# EAGLE board GEN7_Itux_RepRapBoard2 (EAGLE 6.1)
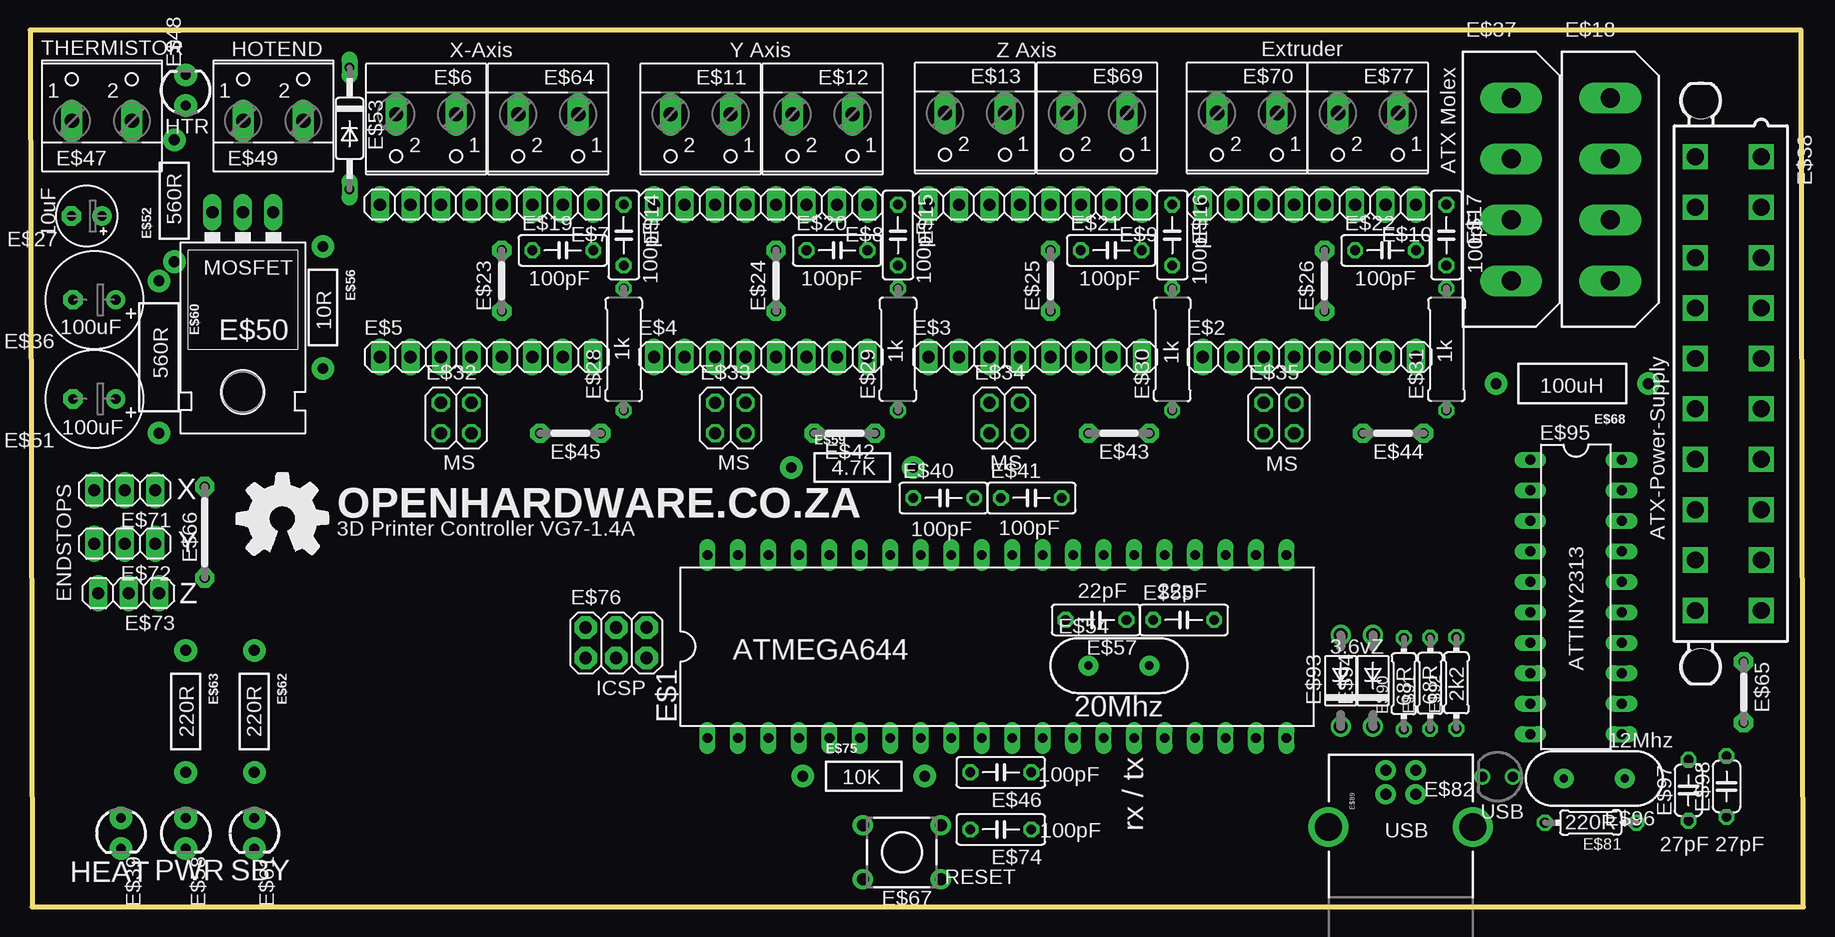
[diagram p0: board, top side]
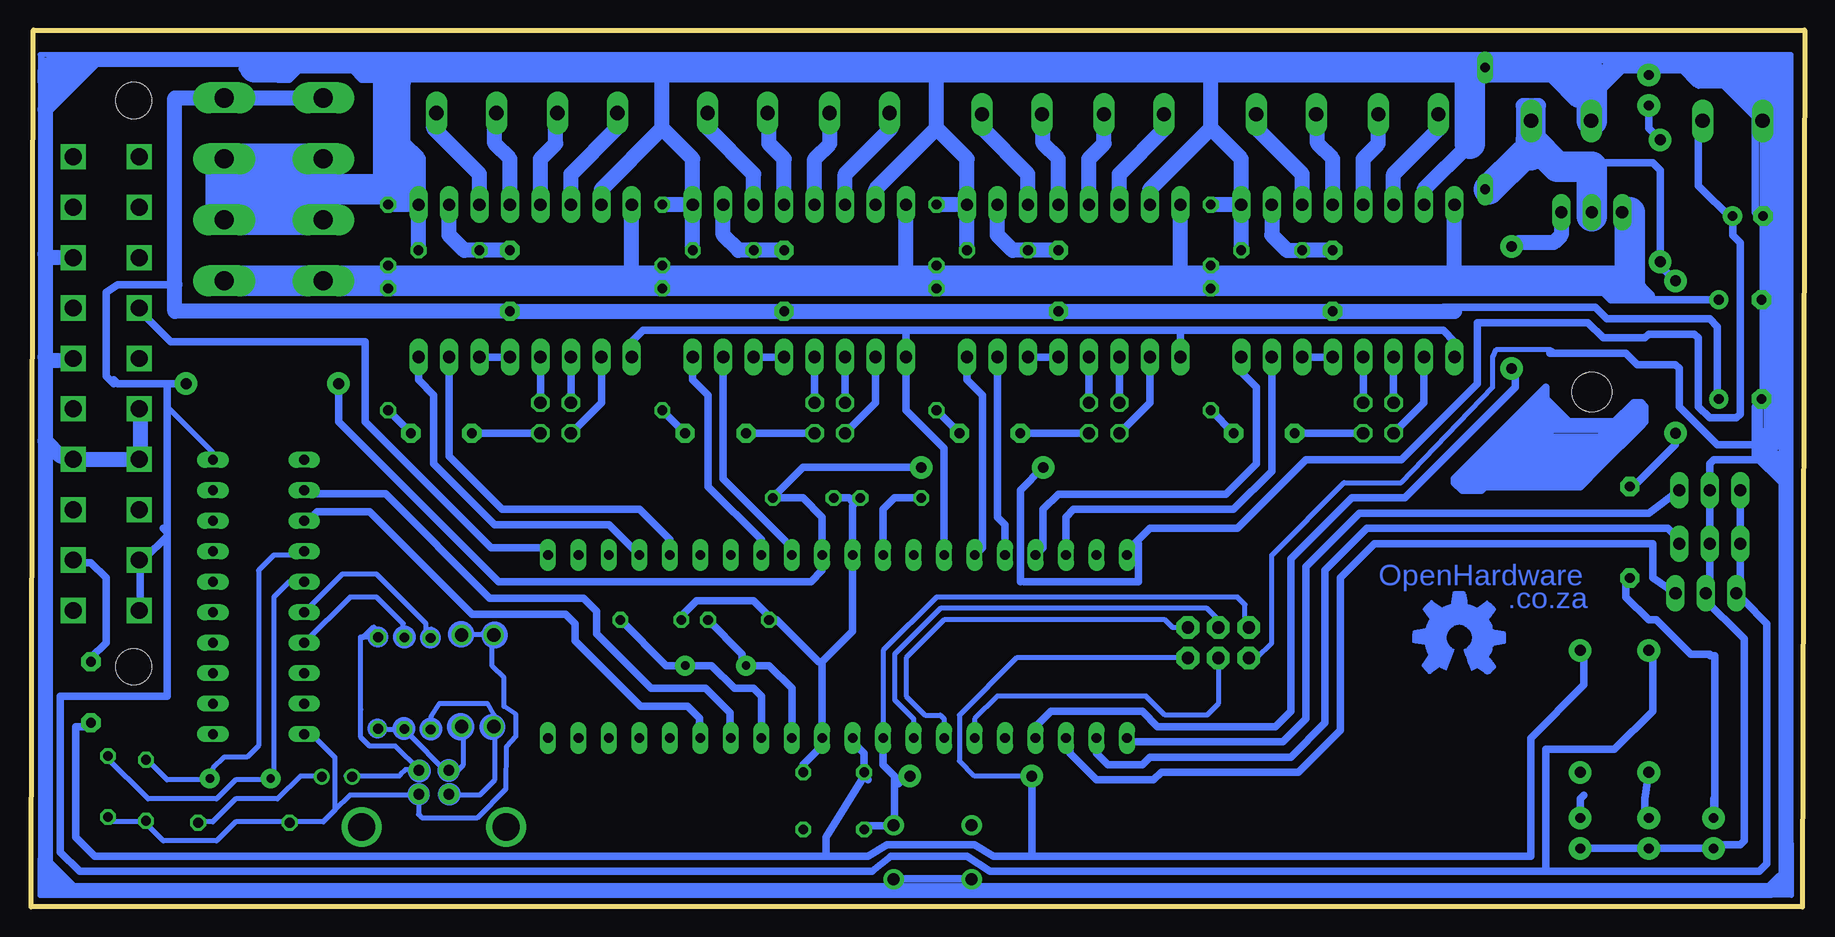
[diagram p1: board, bottom side, seen from below]

Size 147.82 x 73.06 mm. Coordinates in mm from the lower left corner, seen from the top.
Outline: 0,73.06 0.19,0 147.82,0 147.64,73.06 0,73.06
Copper layers (1*16): Top 0.035mm / dielectric 1.5mm / Bottom 0.035mm
Design rules: minimum track width 10mil, minimum drill 24mil, track to track 8mil, track to pad 8mil, pad to pad 8mil, via to via 8mil, smd to smd 8mil, copper to edge 40mil, drill to drill 8mil, minimum pad ring 10mil, minimum via ring 8mil, stop-mask expansion 4mil, vias tented up to drill 0mil, thermal gap 10mil

## Footprints (pad centres in the part's own frame; a part is rotated, then mirrored left to right if it is on the bottom)
DIL40 = drill 0.813 long: 1 -24.13,-7.62; 2 -21.59,-7.62; 3 -19.05,-7.62; 4 -16.51,-7.62; 5 -13.97,-7.62; 6 -11.43,-7.62; 7 -8.89,-7.62; 8 -6.35,-7.62; 9 -3.81,-7.62; 10 -1.27,-7.62; 11 1.27,-7.62; 12 3.81,-7.62; 13 6.35,-7.62; 14 8.89,-7.62; 15 11.43,-7.62; 16 13.97,-7.62; 17 16.51,-7.62; 18 19.05,-7.62; 19 21.59,-7.62; 20 24.13,-7.62; 21 24.13,7.62; 22 21.59,7.62; 23 19.05,7.62; 24 16.51,7.62; 25 13.97,7.62; 26 11.43,7.62; 27 8.89,7.62; 28 6.35,7.62; 29 3.81,7.62; 30 1.27,7.62; 31 -1.27,7.62; 32 -3.81,7.62; 33 -6.35,7.62; 34 -8.89,7.62; 35 -11.43,7.62; 36 -13.97,7.62; 37 -16.51,7.62; 38 -19.05,7.62; 39 -21.59,7.62; 40 -24.13,7.62
1X08 = drill 1.016 long: 1 -8.89,0; 2 -6.35,0; 3 -3.81,0; 4 -1.27,0; 5 1.27,0; 6 3.81,0; 7 6.35,0; 8 8.89,0
W237-102 = drill 1.194 long: 1 -2.5,-1.27; 2 2.5,-1.27
C050-025X075 = drill 0.813 octagon: 1 -2.54,0; 2 2.54,0
9090-4V = drill 1.6 pad 2.6 long: 1 -7.62,0; 2 -2.54,0; 3 2.54,0; 4 7.62,0
05 = drill 0.813 pad 1.6 octagon: 1 -2.54,0; 2 2.54,0
E2,5-5 = drill 0.813 pad 1.6: + -1.27,0 | drill 0.813 pad 1.6 octagon: - 1.27,0
0309/10 = drill 0.813 octagon: 1 -5.08,0; 2 5.08,0
2X02 = drill 1.016 octagon: 1 -1.27,-1.27; 2 -1.27,1.27; 3 1.27,-1.27; 4 1.27,1.27
E3,5-8 = drill 0.813 pad 1.6: + -1.778,0 | drill 0.813 pad 1.6 octagon: - 1.778,0
5566-20 = drill 1.4 square: 1 18.9,-2.75; 2 14.7,-2.75; 3 10.5,-2.75; 4 6.3,-2.75; 5 2.1,-2.75; 6 -2.1,-2.75; 7 -6.3,-2.75; 8 -10.5,-2.75; 9 -14.7,-2.75; 10 -18.9,-2.75; 11 18.9,2.75; 12 14.7,2.75; 13 10.5,2.75; 14 6.3,2.75; 15 2.1,2.75; 16 -2.1,2.75; 17 -6.3,2.75; 18 -10.5,2.75; 19 -14.7,2.75; 20 -18.9,2.75 | hole 3: 23.6,2.29; -23.6,2.29
LED3MM = drill 0.813 pad 1.88: A -1.27,0; K 1.27,0
TO-220-ALT = drill 1.016 long: GND 0,-3.81; IN -2.54,-3.81; OUT 2.54,-3.81 | hole 3.302: 0,11.176
AXIAL-0.4 = drill 0.9 pad 1.88: P$1 -5.08,0; P$2 5.08,0
C2992 = drill 0.813 long: A 5.08,0; C -5.08,0
HC49US = drill 0.7 pad 1.651: 1 -2.54,0; 2 2.54,0
AXIAL-0.5 = drill 0.9 pad 1.88: P$1 -6.35,0; P$2 6.35,0
07 = drill 0.813 pad 1.6 octagon: 1 -3.81,0; 2 3.81,0
TL1105 = drill 1 pad 1.676: 1 -2.25,3.25; 2 2.25,3.25; 3 -2.25,-3.25; 4 2.25,-3.25
1X03 = drill 1.016 long: 1 -2.54,0; 2 0,0; 3 2.54,0
2X03 = drill 1.016 pad 1.88 octagon: 1 -2.54,-1.27; 2 -2.54,1.27; 3 0,-1.27; 4 0,1.27; 5 2.54,-1.27; 6 2.54,1.27
0204/7 = drill 0.813 octagon: 1 -3.81,0; 2 3.81,0
LED3MM-NS = drill 0.813: A -1.27,0; K 1.27,0
USB-B-PTH = drill 0.914 pad 1.676: D+ 0,1.25; D- 1.981,1.25; GND 0,-1.25; VBUS 1.981,-1.25 | drill 2.286: S1 -2.718,-6.02; S2 -2.718,6.02
DO41-7 = drill 1.118: A 3.81,0; C -3.81,0
DIL20 = drill 0.813 long: 1 -11.43,-3.81; 2 -8.89,-3.81; 3 -6.35,-3.81; 4 -3.81,-3.81; 5 -1.27,-3.81; 6 1.27,-3.81; 7 3.81,-3.81; 8 6.35,-3.81; 9 8.89,-3.81; 10 11.43,-3.81; 11 11.43,3.81; 12 8.89,3.81; 13 6.35,3.81; 14 3.81,3.81; 15 1.27,3.81; 16 -1.27,3.81; 17 -3.81,3.81; 18 -6.35,3.81; 19 -8.89,3.81; 20 -11.43,3.81
C050-024X044 = drill 0.813 octagon: 1 -2.54,0; 2 2.54,0

## Placement (x,y rotation side)
E$1  [DIL40]  80.61,21.68 0 top
E$2  [1X08]  106.64,45.81 0 top
E$3  [1X08]  83.78,45.81 0 top
E$4  [1X08]  60.92,45.81 0 top
E$5  [1X08]  38.06,45.81 0 top
E$6  [W237-102]  33.02,64.77 180 top
E$7  [1X08]  38.06,58.51 180 top
E$8  [1X08]  60.92,58.51 180 top
E$9  [1X08]  83.78,58.51 180 top
E$10  [1X08]  106.64,58.51 180 top
E$11  [W237-102]  55.89,64.77 180 top
E$12  [W237-102]  66.07,64.77 180 top
E$13  [W237-102]  78.76,64.86 180 top
E$14  [C050-025X075]  49.49,55.97 270 top
E$15  [C050-025X075]  72.35,55.97 270 top
E$16  [C050-025X075]  95.21,55.97 270 top
E$17  [C050-025X075]  118.07,55.97 270 top
E$18  [9090-4V]  131.73,59.78 270 top
E$19  [C050-025X075]  44.41,54.7 0 top
E$20  [C050-025X075]  67.27,54.7 0 top
E$21  [C050-025X075]  90.13,54.7 0 top
E$22  [C050-025X075]  112.99,54.7 0 top
E$23  [05]  39.33,52.16 90 top
E$24  [05]  62.19,52.16 90 top
E$25  [05]  85.05,52.16 90 top
E$26  [05]  107.91,52.16 90 top
E$27  [E2,5-5]  4.73,57.56 180 top
E$28  [0309/10]  49.49,46.45 90 top
E$29  [0309/10]  72.35,46.45 90 top
E$30  [0309/10]  95.21,46.45 90 top
E$31  [0309/10]  118.07,46.45 90 top
E$32  [2X02]  35.52,40.73 0 top
E$33  [2X02]  58.38,40.73 0 top
E$34  [2X02]  81.24,40.73 0 top
E$35  [2X02]  104.1,40.73 0 top
E$36  [E3,5-8]  5.36,50.58 180 top
E$37  [9090-4V]  123.47,59.78 270 top
E$38  [5566-20]  141.57,43.59 90 top
E$39  [LED3MM]  7.58,6.13 270 top
E$40  [C050-025X075]  76.16,34.07 0 top
E$41  [C050-025X075]  83.47,34.07 0 top
E$42  [05]  67.91,39.46 180 top
E$43  [05]  90.77,39.46 180 top
E$44  [05]  113.63,39.46 180 top
E$45  [05]  45.05,39.46 180 top
E$46  [C050-025X075]  80.93,11.21 180 top
E$47  [W237-102]  6,66.77 0 top
E$48  [LED3MM]  12.98,68.04 90 top
E$49  [W237-102]  20.28,66.77 0 top
E$50  [TO-220-ALT]  17.74,54.07 180 top
E$51  [E3,5-8]  5.36,42.32 180 top
E$52  [AXIAL-0.4]  12.03,58.83 90 top
E$53  [C2992]  26.63,64.86 270 top
E$54  [HC49US]  90.77,20.1 0 top
E$55  [C050-025X075]  96.17,23.91 0 top
E$56  [AXIAL-0.4]  24.41,49.94 270 top
E$57  [C050-025X075]  88.86,23.91 180 top
E$58  [LED3MM]  12.98,6.13 270 top
E$59  [AXIAL-0.4]  68.54,36.61 0 top
E$60  [AXIAL-0.5]  10.76,45.81 270 top
E$61  [LED3MM]  18.7,6.13 270 top
E$62  [AXIAL-0.4]  18.7,16.29 270 top
E$63  [AXIAL-0.4]  12.98,16.29 270 top
E$64  [W237-102]  43.2,64.77 180 top
E$65  [05]  142.84,17.87 270 top
E$66  [07]  14.57,31.21 90 top
E$67  [TL1105]  72.67,4.54 90 top
E$68  [AXIAL-0.5]  128.55,43.59 180 top
E$69  [W237-102]  88.94,64.86 180 top
E$70  [W237-102]  101.45,64.86 180 top
E$71  [1X03]  7.9,34.7 180 top
E$72  [1X03]  7.9,30.26 180 top
E$73  [1X03]  8.22,26.13 180 top
E$74  [C050-025X075]  80.93,6.44 180 top
E$75  [AXIAL-0.4]  69.5,10.89 0 top
E$76  [2X03]  48.86,22 0 top
E$77  [W237-102]  111.53,64.86 180 top
E$81  2K2  [0204/7]  130.09,7.01 180 top
E$82  [LED3MM-NS]  122.32,10.82 180 top
E$89  [USB-B-PTH]  114.25,9.38 90 top
E$90  68RD+  [0204/7]  114.52,18.59 90 top
E$91  68Rd-  [0204/7]  116.71,18.62 90 top
E$92  2K2  [0204/7]  118.9,18.65 90 top
E$93  [DO41-7]  109.26,18.84 90 top
E$94  [DO41-7]  111.94,18.84 90 top
E$95  [DIL20]  128.87,25.81 270 top
E$96  [HC49US]  130.39,10.68 180 top
E$97  [C050-024X044]  138.25,9.7 90 top
E$98  [C050-024X044]  141.42,10.02 90 top

## Library data of the parts
E$1 = atmel
E$2-E$5 E$7-E$10 E$32-E$35 E$71-E$73 = pinhead
E$6 E$11-E$13 E$47 E$49 E$64 E$69 E$70 E$77 = con-wago-500
E$14-E$17 E$19-E$22 E$27-E$31 E$36 E$40 E$41 E$46 E$51 E$55 E$57 E$74 E$81 E$90-E$92 E$97 E$98 = rcl
E$18 E$37 = con-thomas-betts
E$23-E$26 E$42-E$45 E$65 E$66 = jumper
E$38 = con-molex
E$39 E$48 E$58 E$61 E$82 = SparkFun-LED
E$50 = SparkFun-PowerIC
E$52 E$56 E$59 E$60 E$62 E$63 E$68 E$75 = SparkFun-Passives
E$53 = ref-packages
E$54 E$96 = SparkFun-FreqCtrl
E$67 = switch
E$76 E$89 = SparkFun-Connectors
E$93 E$94 = ref-packages-longpad
E$95 = 40xx

## Nets
S$1: E$7.3
S$2: E$7.4
S$3: E$7.5
S$4: E$7.6
S$5: E$8.3
S$6: E$8.6
S$7: E$8.5
S$8: E$8.4
S$9: E$9.6
S$10: E$9.5
S$11: E$9.4
S$12: E$9.3
S$13: E$10.6
S$14: E$10.5
S$15: E$10.4
S$16: E$10.3
S$17: E$8.8 E$9.8 E$10.8 E$14.2 E$15.2 E$16.2 E$17.2
S$18: E$7.2 E$19.1 E$23.2
S$19: E$10.1 E$17.1 E$22.2
S$20: E$8.2 E$20.1 E$24.2
S$21: E$1.21
S$23: E$9.2 E$21.1 E$25.2
S$24: E$71.3
S$25: E$10.2 E$22.1 E$26.2
S$26: E$5.2 E$32.1
S$27: E$5.3 E$32.2
S$28: E$5.4 E$32.4
S$29: E$4.2 E$33.1
S$30: E$4.3 E$33.2
S$31: E$4.4 E$33.4
S$32: E$3.2 E$34.1
S$33: E$3.3 E$34.2
S$34: E$3.4 E$34.4
S$35: E$2.2 E$35.1
S$36: E$2.3 E$35.2
S$37: E$2.4 E$35.4
S$38: E$5.5 E$5.6
S$39: E$4.5 E$4.6
S$40: E$3.5 E$3.6
S$41: E$2.5 E$2.6
S$42: E$28.1
S$43: E$29.1
S$44: E$30.1
S$45: E$31.1
S$46: E$32.3 E$45.2
S$47: E$1.36 E$4.7
S$48: E$1.38 E$5.7
S$49: E$1.34 E$2.1 E$3.1 E$4.1 E$5.1
S$50: E$33.3 E$42.2
S$51: E$34.3 E$43.2
S$52: E$35.3 E$44.2
S$53: E$7.1 E$7.7 E$8.1 E$8.7 E$9.1 E$9.7 E$10.7 E$14.1 E$15.1 E$16.1 E$18.3 E$19.2 E$20.2 E$21.2 E$37.2 E$37.3
S$54: E$53.A
S$56: E$1.25 E$2.7
S$57: E$1.37 E$5.8
S$58: E$1.29 E$3.7
S$59: E$1.35 E$4.8
S$60: E$1.28 E$3.8
S$61: E$1.24 E$2.8
S$66: E$46.2
S$74: E$41.1
S$75: E$40.2
S$79: E$41.2 E$59.P$2
S$80: E$1.32 E$40.1
S$81: E$1.12 E$57.1
S$84: E$27.- E$48.K
S$88: E$48.A E$52.P$2
S$91: E$1.9 E$74.2
S$92: E$60.P$2
S$93: E$71.1
S$94: E$1.2
S$97: E$1.13 E$55.2
S$99: E$46.1
S$108: E$95.20
S$110: E$59.P$1
S$114: E$63.P$2
S$116: E$61.A
S$117: E$68.P$1
S$120: E$1.8 E$76.4
S$121: E$1.6 E$76.3
S$122: E$76.6
S$123: E$76.1
S$124: E$75.P$1 E$76.5
S$176: E$26.1 E$37.1
S$182: E$95.7
S$183: E$95.6
S$185: E$95.5

## Tracks (layer width: path | path; a pad name or v marks a point on that pad's centre or on a via)
S$1
  Bottom 1.27: E$7.3 41.87,61.05 45.68,64.86 45.68,66.13
S$2
  Bottom 1.27: E$7.4 39.33,62.32 40.6,63.59 40.6,66.13
S$3
  Bottom 1.27: E$7.5 36.79,62.32 35.52,63.59 35.52,66.13
S$4
  Bottom 1.27: E$7.6 34.25,61.05 30.44,64.86 30.44,66.13
S$5
  Bottom 1.27: E$8.3 64.73,61.05 68.54,64.86 68.54,66.13
S$6
  Bottom 1.27: E$8.6 57.11,61.05 53.3,64.86 53.3,66.13
S$7
  Bottom 1.27: E$8.5 59.65,62.32 58.38,63.59 58.38,66.13
S$8
  Bottom 1.27: E$8.4 62.19,62.32 63.46,63.59 63.46,66.13
S$9
  Bottom 1.27: E$9.6 79.97,61.05 76.16,64.86 76.16,66.13
S$10
  Bottom 1.27: E$9.5 82.51,62.32 81.24,63.59 81.24,66.13
S$11
  Bottom 1.27: E$9.4 85.05,62.32 86.32,63.59 86.32,66.13
S$12
  Bottom 1.27: E$9.3 87.59,61.05 91.4,64.86 91.4,66.13
S$13
  Bottom 1.27: E$10.6 102.83,61.05 99.02,64.86 99.02,66.13
S$14
  Bottom 1.27: E$10.5 105.37,62.32 104.1,63.59 104.1,66.13
S$15
  Bottom 1.27: E$10.4 107.91,62.32 109.18,63.59 109.18,66.13
S$16
  Bottom 1.27: E$10.3 110.45,61.05 114.26,64.86 114.26,66.13
S$17
  Bottom 1.27: 97.75,52.16 E$10.8 | 74.89,52.16 E$9.8 | 52.03,52.16 E$8.8 | 118.07,52.16 E$17.2 | 95.21,52.16 E$16.2 | 72.35,52.16 E$15.2 | 49.49,52.16 E$14.2
  Bottom 2.54: 132.04,52.16 118.07,52.16 97.75,52.16 95.21,52.16 74.89,52.16 72.35,52.16 52.03,52.16 49.49,52.16 14.57,52.16 14.57,57.88
S$18
  Bottom 1.27: E$7.2 44.41,55.97 43.14,54.7 E$19.1 E$23.2
S$19
  Bottom 1.27: E$10.1 115.53,62.32 116.8,63.59 116.8,68.67 | E$10.1 E$17.1 | E$22.2 E$10.1
S$20
  Bottom 1.27: E$8.2 67.27,55.97 66,54.7 E$20.1 E$24.2
S$21
  Bottom 0.61: 138.71,49.94 138.71,49.62 136.17,47.08 119.98,47.08 119.98,40.42 109.5,29.94 105.37,29.94 E$1.21
S$22
  Bottom 0.406: 123.47,10.89 125.38,10.89 127.28,8.98 130.77,8.98 132.68,7.08 133.95,7.08
S$23
  Bottom 1.27: E$9.2 90.13,55.97 88.86,54.7 E$21.1 E$25.2
S$24
  Bottom 0.61: E$71.3 5.36,25.49 5.04,25.49 3.14,23.59 3.14,3.59 3.77,2.95 25.05,2.95
S$25
  Bottom 1.27: E$10.2 112.99,55.97 111.72,54.7 E$22.1 E$26.2
S$26
  Bottom 0.61: E$5.2 31.71,42 E$32.1
S$27
  Bottom 0.61: E$32.2 E$5.3
S$28
  Bottom 0.61: E$32.4 E$5.4
S$29
  Bottom 0.61: E$4.2 54.57,42 E$33.1
S$30
  Bottom 0.61: E$33.2 E$4.3
S$31
  Bottom 0.61: E$33.4 E$4.4
S$32
  Bottom 0.61: E$3.2 77.43,42 E$34.1
S$33
  Bottom 0.61: E$34.2 E$3.3
S$34
  Bottom 0.61: E$34.4 E$3.4
S$35
  Bottom 0.61: E$2.2 100.29,42 E$35.1
S$36
  Bottom 0.61: E$35.2 E$2.3
S$37
  Bottom 0.61: E$35.4 E$2.4
S$38
  Bottom 0.61: E$5.5 E$5.6
S$39
  Bottom 0.61: E$4.5 E$4.6
S$40
  Bottom 0.61: E$3.5 E$3.6
S$41
  Bottom 0.61: E$2.5 E$2.6
S$42
  Bottom 0.61: 47.59,39.46 E$28.1
S$43
  Bottom 0.61: 70.45,39.46 E$29.1
S$44
  Bottom 0.61: 93.31,39.46 E$30.1
S$45
  Bottom 0.61: 116.17,39.46 E$31.1
S$46
  Bottom 0.61: E$32.3 E$45.2
S$47
  Bottom 0.61: E$4.7 67.27,32.48 66.64,31.84 E$1.36
S$48
  Bottom 0.61: E$1.38 61.56,32.48 60.92,33.11 47.59,33.11 44.41,36.29 E$5.7
S$49
  Bottom 0.61: E$1.34 71.72,38.19 74.89,41.37 E$3.1 74.89,48.04 | E$5.1 29.17,47.08 30.12,48.04 52.03,48.04 | 52.03,48.04 74.89,48.04 | 74.89,48.04 96.8,48.04 97.75,47.08 E$2.1 | E$4.1 52.03,48.04
S$50
  Bottom 0.61: E$33.3 E$42.2
S$51
  Bottom 0.61: E$34.3 E$43.2
S$52
  Bottom 0.61: E$44.2 106.01,39.46 E$35.3
S$53
  Bottom 0.406: 18.7,69.94 16.79,69.94 16.47,70.26 14.88,70.26 9.49,70.26 7.9,68.67 7.9,69.31 8.85,70.26 8.85,69.94 7.58,68.67
  Bottom 1.016: E$7.7 31.71,59.78 | 7.58,68.67 8.85,68.67 10.12,69.94 14.57,69.94 14.88,70.26 15.84,70.26 16.79,69.31
  Bottom 1.27: E$21.2 E$9.1 | E$9.1 92.67,62.32 95.21,64.86 | E$8.1 69.81,62.32 72.35,64.86 | E$7.1 46.95,62.32 49.49,64.86 | 31.71,59.78 27.9,63.59 | 49.49,64.86 49.49,69.94 | E$8.7 54.57,59.78 49.49,64.86 | 72.35,64.86 72.35,69.94 | E$9.7 77.43,59.78 72.35,64.86 | 95.21,64.86 95.21,69.94 | E$10.7 100.29,59.78 95.21,64.86 | E$7.1 E$14.1 | E$8.1 E$15.1 | E$9.1 E$16.1 | E$19.2 E$7.1 | E$20.2 E$8.1
  Bottom 2.54: 27.9,63.59 27.9,69.94 | 27.9,69.94 49.49,69.94 72.35,69.94 95.21,69.94 118.07,69.94 | 118.07,69.94 118.07,59.78 123.47,59.78 E$37.2 | E$37.2 E$37.3 | 118.07,69.94 119.66,69.94 | 27.9,69.94 18.7,69.94 18.38,69.94 17.74,69.31 17.74,65.5 | E$37.2 132.04,62.32 132.04,57.56 E$18.3 123.79,57.24 123.79,59.78 124.74,60.74 129.82,60.74 130.14,60.42 130.14,58.83 125.38,58.83 124.74,59.47
S$54
  Bottom 0.61: 25.36,61.05 E$53.A
S$55
  Bottom 0.61: 82.19,13.43 81.56,14.06
S$56
  Bottom 0.61: E$2.7 112.99,37.56 108.55,33.11 97.12,33.11 94.58,30.57 E$1.25
S$57
  Bottom 0.61: E$5.8 46.95,44.54 45.68,43.27 45.68,36.92 48.22,34.38 62.19,34.38 63.46,33.11 63.46,29.94 E$1.37
S$58
  Bottom 0.61: E$3.7 90.13,35.65 84.42,29.94 E$1.29
S$59
  Bottom 0.61: E$4.8 69.81,43.91 68.54,42.64 68.54,29.94 E$1.35
S$60
  Bottom 0.61: E$3.8 92.67,43.91 91.4,42.64 91.4,35.02 86.96,30.57 E$1.28
S$61
  Bottom 0.61: E$2.8 115.53,43.91 114.26,42.64 114.26,36.92 109.18,31.84 99.66,31.84 E$1.24
S$62
  Bottom 0.61: 144.43,28.67 142.84,28.67 141.57,27.4 141.57,22 142.84,20.73
S$63
  Bottom 1.27: 22.82,62.96 22.82,63.91 22.82,65.5
  Bottom 2.54: 17.74,57.56 17.74,61.69 20.6,61.69 22.82,63.91
S$64
  Bottom 2.54: 22.82,62.64 23.46,62.64 26.32,59.78
S$65
  Bottom 0.61: 5.36,35.02 5.04,35.34
S$66
  Bottom 0.61: 79.34,13.75 78.39,12.79 E$46.2
S$67
  Bottom 2.54: 127.28,69.94 129.18,69.94
S$68
  Bottom 0.61: 24.41,2.95 67.91,2.95 69.81,4.22 76.16,4.22 77.75,2.95 143.79,2.95 145.38,4.54 145.38,17.56 136.49,17.56 136.49,31.21 136.8,31.53
S$69
  Bottom 0.61: 7.27,4.86 18.38,4.86 18.7,5.17
S$70
  Bottom 0.61: 118.07,69.81 118.07,70.46 118.53,70.92 129.12,70.92 130.21,69.83 128.05,69.83 127.21,68.99
S$71
  Bottom 0.61: 128.66,69.13 127.4,69.13 127.25,68.97 126.31,68.97 125.53,69.76 121.04,69.76 120.26,68.97 119.36,68.97 119.32,69.01
S$72
  Bottom 0.61: 120.85,70.08 125.66,70.08 126.01,69.74 126.01,70.56 126.06,70.62 120.14,70.62 119.95,70.42
S$74
  Bottom 0.61: E$41.1 79.65,34.07 79.34,33.75
S$75
  Bottom 0.61: 81.88,13.75 81.88,20.41 79.34,22.95 79.34,33.43 E$40.2
S$76
  Bottom 0.61: 28.86,49.94 28.86,49.62
S$77
  Bottom 0.61: 7.58,5.17 5.36,5.17 5.04,5.49 5.04,22.32 8.53,25.81
S$79
  Bottom 0.61: E$59.P$2 83.47,36.61 E$41.2 83.47,34.07 81.88,32.48 81.88,28.03 82.83,27.08 108.86,27.08
S$80
  Bottom 0.61: E$40.1 75.84,34.07 76.8,33.11 E$1.32
S$81
  Bottom 0.61: E$1.12 84.42,18.19 86.32,20.1 88.23,20.1 88.55,19.78 88.55,21.05 E$57.1
S$82
  Bottom 1.27: 22.19,63.59 22.19,66.77 23.46,66.77 23.46,62.32
S$84
  Bottom 0.61: 3.45,42 3.45,57.24 | 3.45,57.24 E$27.- | E$27.- 3.45,65.18 3.14,65.5 3.14,70.58 8.85,70.58 | 8.85,70.58 12.98,70.58 | 12.98,70.58 19.33,70.58 | E$48.K 12.98,70.58 | 8.85,70.58 4.09,65.82 4.09,57.88 3.45,57.24 | E$27.- 3.45,65.82 7.9,70.26 1.55,70.26 1.55,69.94 2.19,69.31 2.19,69.94 6.95,69.94 3.77,66.77
  Bottom 1.27: 6.95,69.63 6.63,69.63 3.77,66.77 3.77,69.31 3.45,69.63 5.36,69.63 | 5.68,69.63 5.36,69.63 | 5.36,69.63 4.41,68.67 3.77,68.67 2.82,69.63 2.82,39.46 2.5,39.46 2.19,39.78 2.19,69.31 2.5,69.63
S$85
  Bottom 0.61: 7.27,50.58 16.16,50.58 17.11,51.53
S$86
  Bottom 1.27: 20.28,57.56 20.28,55.97 20.92,55.34 23.78,55.34 24.09,55.02
S$87
  Bottom 0.61: 8.85,65.5 8.85,60.1 6,57.24 6,55.97 5.36,55.34 5.36,41.05 5.68,40.73 7.9,40.73 8.85,41.69 8.85,47.4 9.17,47.72 12.98,47.72 13.3,47.4 16.79,47.4 18.06,48.67 27.27,48.67 27.27,43.59 33.62,37.24 41.56,37.24 47.27,31.53 54.57,31.53 56.48,29.62
S$88
  Bottom 0.61: E$48.A 12.98,64.86 E$52.P$2
S$89
  Bottom 0.61: 17.11,62.01 12.66,62.01 12.03,61.37 12.03,54.07 11.71,53.75 11.71,53.12 10.76,52.16
S$90
  Bottom 0.61: 29.17,49.94 29.81,49.62 30.12,49.94 17.42,49.94 16.47,48.99 7.9,48.99 7.27,48.35 7.27,42
S$91
  Bottom 0.61: 75.84,6.44 75.84,6.76 | 75.84,6.76 75.84,10.89 76.8,11.84 E$1.9 | 75.84,6.76 78.07,6.76 E$74.2
S$92
  Bottom 0.61: E$60.P$2 10.76,38.51 14.57,34.7
S$93
  Bottom 0.61: 56.48,13.75 43.46,13.75 41.56,15.65 41.56,28.35 37.11,32.8 12.98,32.8 E$71.1
S$94
  Bottom 0.61: E$1.2 59.02,12.79 58.07,11.84 55.21,11.84 54.57,12.48 42.83,12.48 39.97,15.33 39.97,28.03 36.47,31.53 11.39,31.53 10.12,30.26
S$95
  Bottom 0.61: 61.24,14.06 61.24,12.79 59.02,10.57 54.26,10.57 53.62,11.21 42.19,11.21 38.7,14.7 38.7,27.4 35.84,30.26 12.66,30.26 12.66,27.4 10.76,26.13
S$96
  Bottom 0.61: 14.88,27.4 14.88,25.81 12.98,23.91 12.35,23.91 9.49,21.05 7.9,21.05
S$97
  Bottom 0.61: E$1.13 86.96,17.56 87.59,18.19 89.18,18.19 91.08,20.1 94.9,20.1 E$55.2
S$98
  Bottom 0.61: 93.94,23.91 92.35,25.49 87.59,25.49 86.01,23.91 85.69,23.91 82.19,20.41
S$99
  Bottom 0.61: E$46.1 83.47,11.84 81.88,13.43
S$100
  Bottom 0.61: 21.55,3.27 21.55,13.11 15.84,13.11 12.66,16.29 12.66,21.37
S$101
  Bottom 0.61: 18.38,21.37 18.38,18.51 22.82,14.06 22.82,4.22 67.59,4.22 69.18,5.17 76.48,5.17 78.07,4.22 142.52,4.22 144.11,5.81 144.11,15.02 143.16,15.02
S$102
  Bottom 0.61: 30.44,69.63 19.65,69.63 18.38,70.9 1.55,70.9 1.23,70.58 1.23,39.46 2.5,38.19 3.14,38.19
S$103
  Bottom 0.61: 78.07,10.57 78.39,10.89 81.56,5.81 81.56,4.54
S$104
  Bottom 1.27: 107.28,70.26 108.23,70.26 108.55,70.58 145.69,70.58 146.65,69.63 146.65,66.45 | 121.57,70.58 142.52,70.58 146.65,66.45 | 146.65,66.45 146.65,54.39 | 146.65,54.39 146.65,45.81 | 146.65,45.81 146.65,38.83 | 146.65,38.83 145.38,37.56 144.74,37.56 144.43,37.24 139.35,37.24 138.71,37.88 138.71,41.37 | 144.43,45.5 146.33,45.5 146.65,45.81 | 144.43,54.07 146.33,54.07 146.65,54.39 | 146.65,38.83 146.65,3.59 144.43,1.36 2.82,1.36 1.87,2.32
S$105
  Bottom 1.27: 143.79,70.26 144.11,70.26 145.69,68.67 145.69,69.63
S$106
  Bottom 0.61: 69.5,2.32 75.84,2.32
S$107
  Bottom 0.61: 74.58,11.21 75.53,10.25
S$108
  Bottom 0.406: E$95.20 132.68,37.88 136.49,41.69
  Bottom 0.61: 139.03,24.22 138.71,24.54 138.71,28.99 138.39,28.99 136.49,30.89 136.49,41.69 136.49,43.59
S$109
  Bottom 0.61: 64.41,10.57 64.41,4.54
S$110
  Bottom 0.61: 65.37,27.08 65.37,34.7 E$59.P$1
S$111
  Bottom 0.61: 65.05,27.08 55.52,27.08 55.52,30.26
S$112
  Bottom 0.61: 24.09,44.54 24.09,43.27 33.3,34.07 37.74,34.07 42.83,28.99 42.83,16.29 44.1,15.02 53.94,15.02 55.21,16.29 62.83,16.29 64.1,15.02 64.1,14.06 63.78,13.75
S$113
  Bottom 0.61: 7.58,7.08 7.58,8.98
S$114
  Bottom 0.61: 13.3,7.4 13.3,8.98 E$63.P$2
S$115
  Bottom 0.406: 125.38,35.02 124.74,34.38 119.02,34.38
S$116
  Bottom 0.61: E$61.A 18.7,8.98 18.38,9.3
S$117
  Bottom 0.61: E$68.P$1 140.61,43.59 140.93,43.91
S$118
  Bottom 0.61: 122.52,43.27 122.2,42.96 122.2,40.42 108.86,27.08
S$119
  Bottom 0.406: 46.63,23.27 46.63,25.18 47.27,25.81 72.35,25.81 76.8,21.37 76.8,14.38
S$120
  Bottom 0.406: E$76.4 48.86,23.91 49.81,24.86 72.04,24.86 75.84,21.05 75.84,17.24 74.26,15.65 E$1.8
S$121
  Bottom 0.406: E$76.3 48.86,16.92 49.81,15.97 53.3,15.97 54.89,17.56 67.27,17.56 69.18,15.65 E$1.6
S$122
  Bottom 0.406: E$76.6 52.67,23.27 53.3,23.91 71.72,23.91 74.89,20.73 74.89,17.56 73.3,15.97 72.04,15.97 71.72,15.65 71.72,14.38 71.4,14.06
S$123
  Bottom 0.406: E$76.1 45.68,20.73 44.41,22 44.41,29.3 38.38,35.34 33.62,35.34 26,43.27 26,45.81 25.68,46.45 21.23,46.45 20.6,46.13
  Bottom 0.61: 3.77,42 4.09,41.69 4.09,37.56 1.87,35.34 1.87,36.61 2.19,36.92 | 2.19,36.92 2.19,37.56 3.14,38.51 3.14,37.24 | 3.14,37.24 2.19,36.29 2.19,36.92 | 2.19,36.92 2.82,37.56 2.82,38.51 3.14,38.83 | 3.14,38.83 3.77,39.46 3.77,39.78 | 3.77,41.69 3.77,39.78 | 3.77,39.78 2.5,38.51 | 2.5,38.51 2.5,38.83 1.55,39.78 1.55,41.05 | 1.55,41.37 1.55,69.94 1.87,70.26 | 3.14,38.83 3.14,38.19 3.77,37.56 3.77,39.15 | 2.5,38.51 7.27,38.51 10.44,41.69 10.44,44.86 10.76,45.18 13.93,45.18 14.88,46.13 20.6,46.13 21.23,46.13 | 3.14,37.24 7.58,37.24 7.9,36.92 7.9,34.7 | 7.9,34.7 8.22,35.02 | 7.9,34.38 7.9,34.7 | 8.22,34.7 7.9,34.38 | 7.9,25.49 7.9,34.38
  Bottom 1.27: 1.55,41.37 1.55,41.05 1.55,2.32 1.87,2
S$124
  Bottom 0.406: E$76.5 65.69,20.73 70.45,15.97 70.45,12.16 69.18,10.89 E$75.P$1
S$125
  Bottom 0.406: 1.58,5.28 1.09,5.28 1.09,0.95 40.73,0.95 40.73,1.33 1.32,1.33 | 1.32,1.33 1.32,1.21 | 1.32,1.33 1.32,1.51 1.51,1.51 1.51,1.4
S$126
  Bottom 0.406: 141.54,1.39 142.7,1.39 142.7,0.93 147.08,0.93 147.08,3.96 146.79,3.96 146.79,1.2 145.06,1.2 145.06,1.22 146.44,1.22 146.44,2.57 146.07,2.57 146.07,1.5 145.44,1.5 145.44,1.46 145.83,1.46 145.83,1.78
S$127
  Bottom 0.406: 145.97,68.24 146.03,68.24 146.03,68.08
S$128
  Bottom 0.406: 146.74,68.75 147.08,68.75 147.08,69.5 145.29,69.5 145.29,71.01 147.07,71.01 147.07,69.4
S$129
  Bottom 0.406: 146.96,69.58 146.83,69.58 146.83,70.61
S$130
  Bottom 0.406: 146.8,70.6 146.42,70.6 146.42,70.63
S$131
  Bottom 0.406: 9.42,70.4 9.09,70.4 9.09,69.96 1.11,69.96 1.11,71.01 26.77,71.01 26.77,70.92
S$132
  Bottom 1.27: 28.61,52.41 29.2,52.41 29.2,58.71
S$133
  Bottom 0.61: 7.57,8.13 7.48,8.13 7.48,20.91 7.86,20.91 7.86,21.01
S$134
  Bottom 0.406: 113.05,9.33 110.41,9.33 109.15,10.59 109.15,14.95 109.27,15.06
S$135
  Bottom 0.406: 113.05,11.35 112.29,11.35 111.79,11.85 111.79,14.83 111.94,14.99
S$136
  Bottom 0.406: 118.94,14.8 116.8,14.8 116.76,14.76 116.5,14.54 113.09,11.13
S$137
  Bottom 0.406: 114.47,14.95 114.47,15.87 113.78,16.95 109.8,16.95 109.27,16.02 109.27,15.22 109.34,15.14
S$138
  Bottom 0.406: 115.44,11.38 117.46,13.4 119.62,13.4 120.35,14.13 120.35,16.42 120.37,17.88 120.37,22.46 118.84,22.53
S$139
  Bottom 0.406: 115.53,9.31 115.53,7.71 115.26,7.43 110.62,7.43 108.23,9.82 108.2,13.33 107.4,14.19 107.4,16.03 108.41,16.7 108.41,19.09 109.38,20.05 109.38,22.53 109.15,22.76
S$140
  Bottom 0.61: 89.58,14.12 89.58,16.16 91.62,18.19 96.15,18.19 100.69,22.74 100.69,24.62 101.78,25.71 109.59,25.71 118.28,34.4 125.24,34.4 125.4,34.56
S$141
  Bottom 0.61: 92.09,13.97 92.09,15.69 93.1,16.71 97.01,16.71 102.49,22.19 102.49,23.6 103.27,24.38 111.08,24.38 119.61,32.91 123.99,32.91 124.93,31.97
S$161
  Bottom 0.406: 111.9,22.71 109.42,22.71 109.33,22.8
S$162
  Bottom 0.406: 110.11,22.85 110.21,22.76
S$163
  Bottom 0.406: 116.8,58.83 116.8,60.1 | 116.8,62.64 116.8,60.1 | 116.8,60.1 116.17,59.47 116.17,62.01 116.49,62.32 116.49,59.47 116.49,59.15
S$164
  Bottom 0.406: 115.67,11.44 116.61,11.44 117.05,11
S$165
  Bottom 0.406: 114.48,22.67 114.71,22.44
S$166
  Bottom 0.406: 120.1,22.57 120.21,22.46 120.14,22.46 119.27,23.33
S$167
  Bottom 0.406: 114.46,22.87 114.46,23.15
S$168
  Bottom 0.406: 116.88,22.58 116.88,22.71
S$169
  Bottom 0.406: 117.12,10.89 121.57,10.89
S$172
  Bottom 0.406: 5.04,68.36 8.85,68.36 10.12,69.63 15.2,69.63 16.79,68.04 16.79,68.36 15.52,69.63 16.16,69.63 | 16.16,69.63 16.47,69.63 16.79,69.94 16.79,69.63 16.47,69.31 16.16,69.63 | 16.16,69.63 15.84,69.94 14.57,69.94
S$173
  Bottom 1.016: 18.06,67.09 19.01,67.09 20.92,68.99
S$174
  Bottom 1.016: 19.01,68.04 19.65,68.67
S$175
  Bottom 1.016: 14.25,52.8 14.25,52.16 12.98,50.89 14.25,50.89
S$176
  Bottom 0.61: 140.93,43.59 141.57,44.23 141.57,51.21 140.61,51.85 135.85,51.85
  Bottom 1.27: 29.17,49.62 E$26.1 135.85,49.62 135.85,51.85 135.85,67.4 E$37.1
S$177
  Bottom 0.61: 14.25,40.73 14.88,40.73 15.52,40.1 20.92,40.1 21.55,39.46 21.55,39.15 22.82,37.88 21.55,37.88 | 21.55,37.88 17.74,37.88 17.42,38.19 | 17.42,38.19 15.84,39.78 20.92,39.78 21.23,40.1 21.23,39.15 21.87,38.51 20.6,38.51 | 20.6,38.51 17.42,38.51 17.11,38.83 | 17.11,38.83 16.79,39.15 17.11,39.15 | 17.11,39.15 20.92,39.15 21.23,38.83 | 21.23,38.83 21.87,38.19 20.92,38.19 20.6,38.51 | 17.11,38.83 21.23,38.83 | 17.11,39.15 16.79,39.46 15.52,39.46 14.57,40.42 | 17.42,38.19 21.23,38.19 21.55,37.88
S$178
  Bottom 0.61: 13.61,40.42 13.61,40.1 | 17.11,36.61 18.7,35.02 26.95,35.02 27.27,35.34 | 13.61,40.1 13.3,40.42 13.3,41.69 13.61,42 14.25,42 15.84,40.42 19.65,40.42 21.55,42.32 21.55,43.27 29.17,35.65 29.17,35.34 28.54,34.7 26.95,34.7 25.05,36.61 17.11,36.61 | 13.61,40.1 17.11,36.61 | 13.61,40.1 14.25,40.1 | 14.25,40.1 17.11,37.24 25.05,37.24 26.95,35.34 | 26.95,35.34 27.27,35.34 | 27.27,35.34 28.54,35.34 28.86,35.65 28.54,35.65 21.87,42.32 21.87,41.69 27.9,35.65 26.95,35.65 26.95,35.97 21.23,41.69 21.23,41.37 20.28,40.42 21.87,40.42 24.73,37.56 24.41,37.56 21.87,40.1 | 21.87,40.1 21.23,40.73 21.23,41.05 21.55,41.05 21.87,40.73 | 21.87,40.73 21.87,40.1 | 21.87,40.1 21.87,39.46 23.78,37.56 17.42,37.56 14.88,40.1 14.88,40.73 13.93,41.69 13.93,40.73 | 13.61,40.73 13.93,40.73 | 13.93,40.73 14.25,40.42 | 13.61,41.37 13.61,40.73 | 13.61,40.73 14.25,40.1 | 26.95,35.34 19.01,35.34 17.42,36.92 24.73,36.92 24.73,36.29 | 24.73,36.29 25.36,35.65 19.65,35.65 19.01,36.29 | 19.01,36.29 24.73,36.29 | 19.01,36.29 18.7,36.29 | 21.87,40.73 21.87,41.37 21.55,41.69
S$179
  Bottom 0.61: 18.38,36.29 18.7,36.29 19.01,35.97 | 19.01,35.97 19.33,35.65 | 19.01,35.97 24.73,35.97 25.05,36.29
S$180
  Bottom 0.61: 22.19,38.83 22.19,39.46 21.55,40.1
S$181
  Bottom 0.406: 119.66,32.8 124.1,32.8 124.74,32.16
S$182
  Bottom 0.406: 116.8,22.95 116.8,23.59 119.02,25.81 121.25,25.81 E$95.7
S$183
  Bottom 0.406: 114.9,22.95 114.9,23.59 119.02,27.72 121.88,27.72 E$95.6
S$184
  Bottom 0.406: 125.06,14.06 124.1,14.06 122.52,12.48 122.52,8.03 | 115.21,9.3 121.25,9.3 122.52,8.03 | 122.52,8.03 123.47,7.08 130.77,7.08 132.36,5.49 136.8,5.49 138.39,7.08 141.25,7.08 141.57,7.4
S$185
  Bottom 0.406: E$95.5 126.33,27.08 127.6,25.81 127.6,10.89 127.91,10.57 130.77,10.57 132.36,8.98 138.07,8.98 141.57,12.48
S$186
  Bottom 0.406: 125.06,29.3 127.6,29.3 128.87,28.03 128.87,13.43 129.82,12.48 131.72,12.48 132.68,11.52 132.68,10.89 132.99,10.57 136.49,10.57 138.07,12.16
(copper drawn outside any net)
  shapes: Bottom area x1261, Bottom circle x14

## Text on the board
Bottom: OpenHardware | .co.za
tPlace: THERMISTOR | HOTEND | Extruder | X-Axis | Y Axis | Z Axis | HTR | ATX Molex | 560R | 10uF | 100pF | 100pF | 100pF | 100pF | MOSFET | 100pF | 100pF | 100pF | 100pF | 100uF | 10R | 1k | 1k | 1k | 1k | 560R | 100uH | 100uF | MS | MS | 4.7K | MS | MS | X | OPENHARDWARE.CO.ZA | 100pF | 100pF | 3D Printer Controller VG7-1.4A | ATX-Power-Supply | Y | ENDSTOPS | Z | 22pF | 22pF | 3.6vZ | ATMEGA644 | ATTINY2313 | ICSP | 2k2 | 68R | 68R | 20Mhz | 220R | 220R | 12Mhz | 100pF | 10K | 100pF | USB | rx / tx | 220R | 27pF | 27pF | USB | RESET | HEAT | PWR | SBY